# Altium PCB PowerHAT_1B2.PcbDoc
Units mm, origin at the board's own origin, x right, y up, seen from the top; angles counter-clockwise.
Board outline 65 x 56 mm, 2 copper layers (TopLayer, BottomLayer); 36 components, 41 nets, 140 pads, 4 vias.
Unrouted connection lines stored in the file: 1.
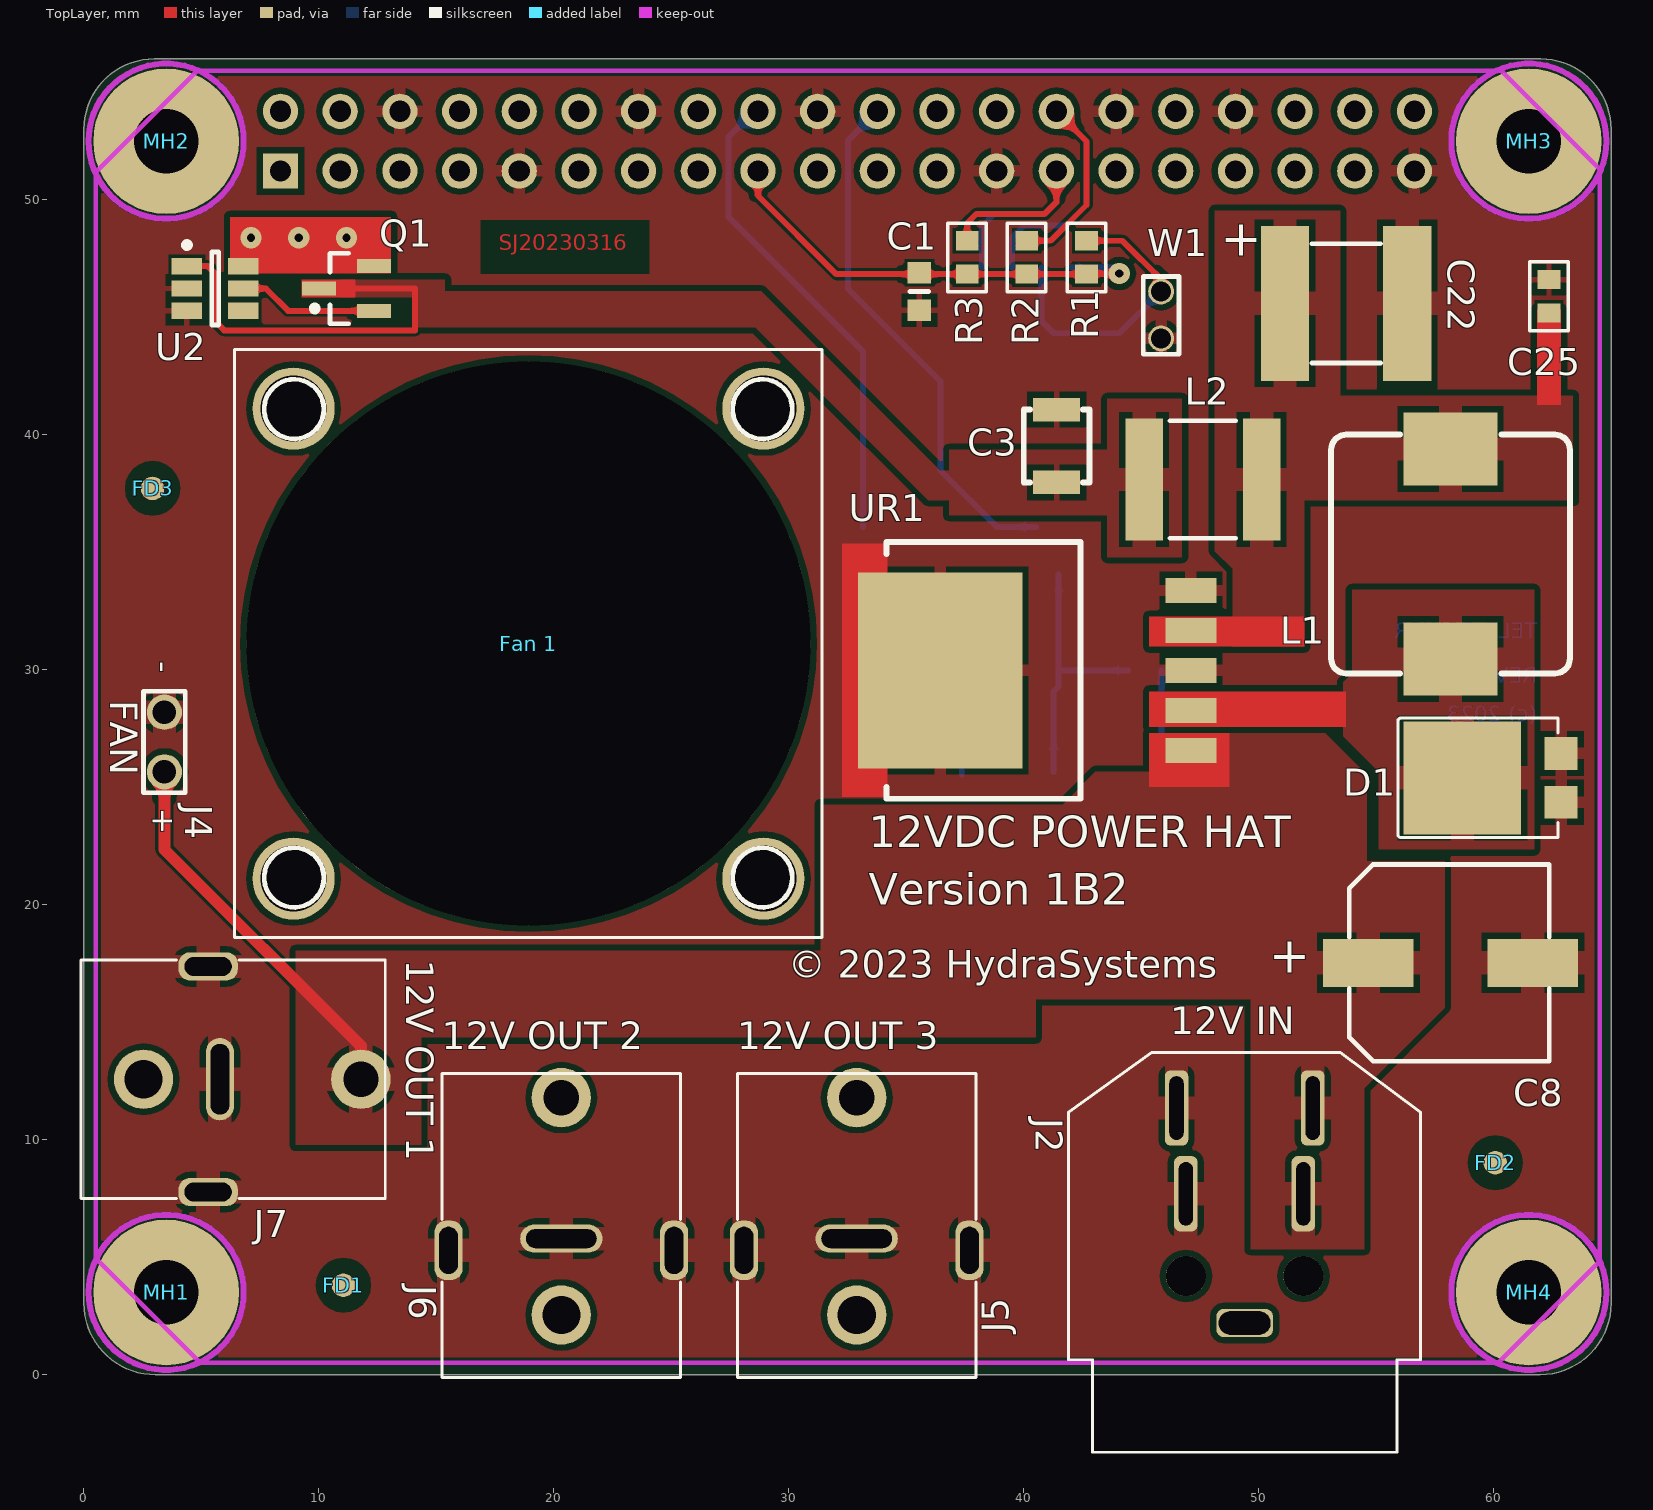
[diagram p0: TopLayer view]
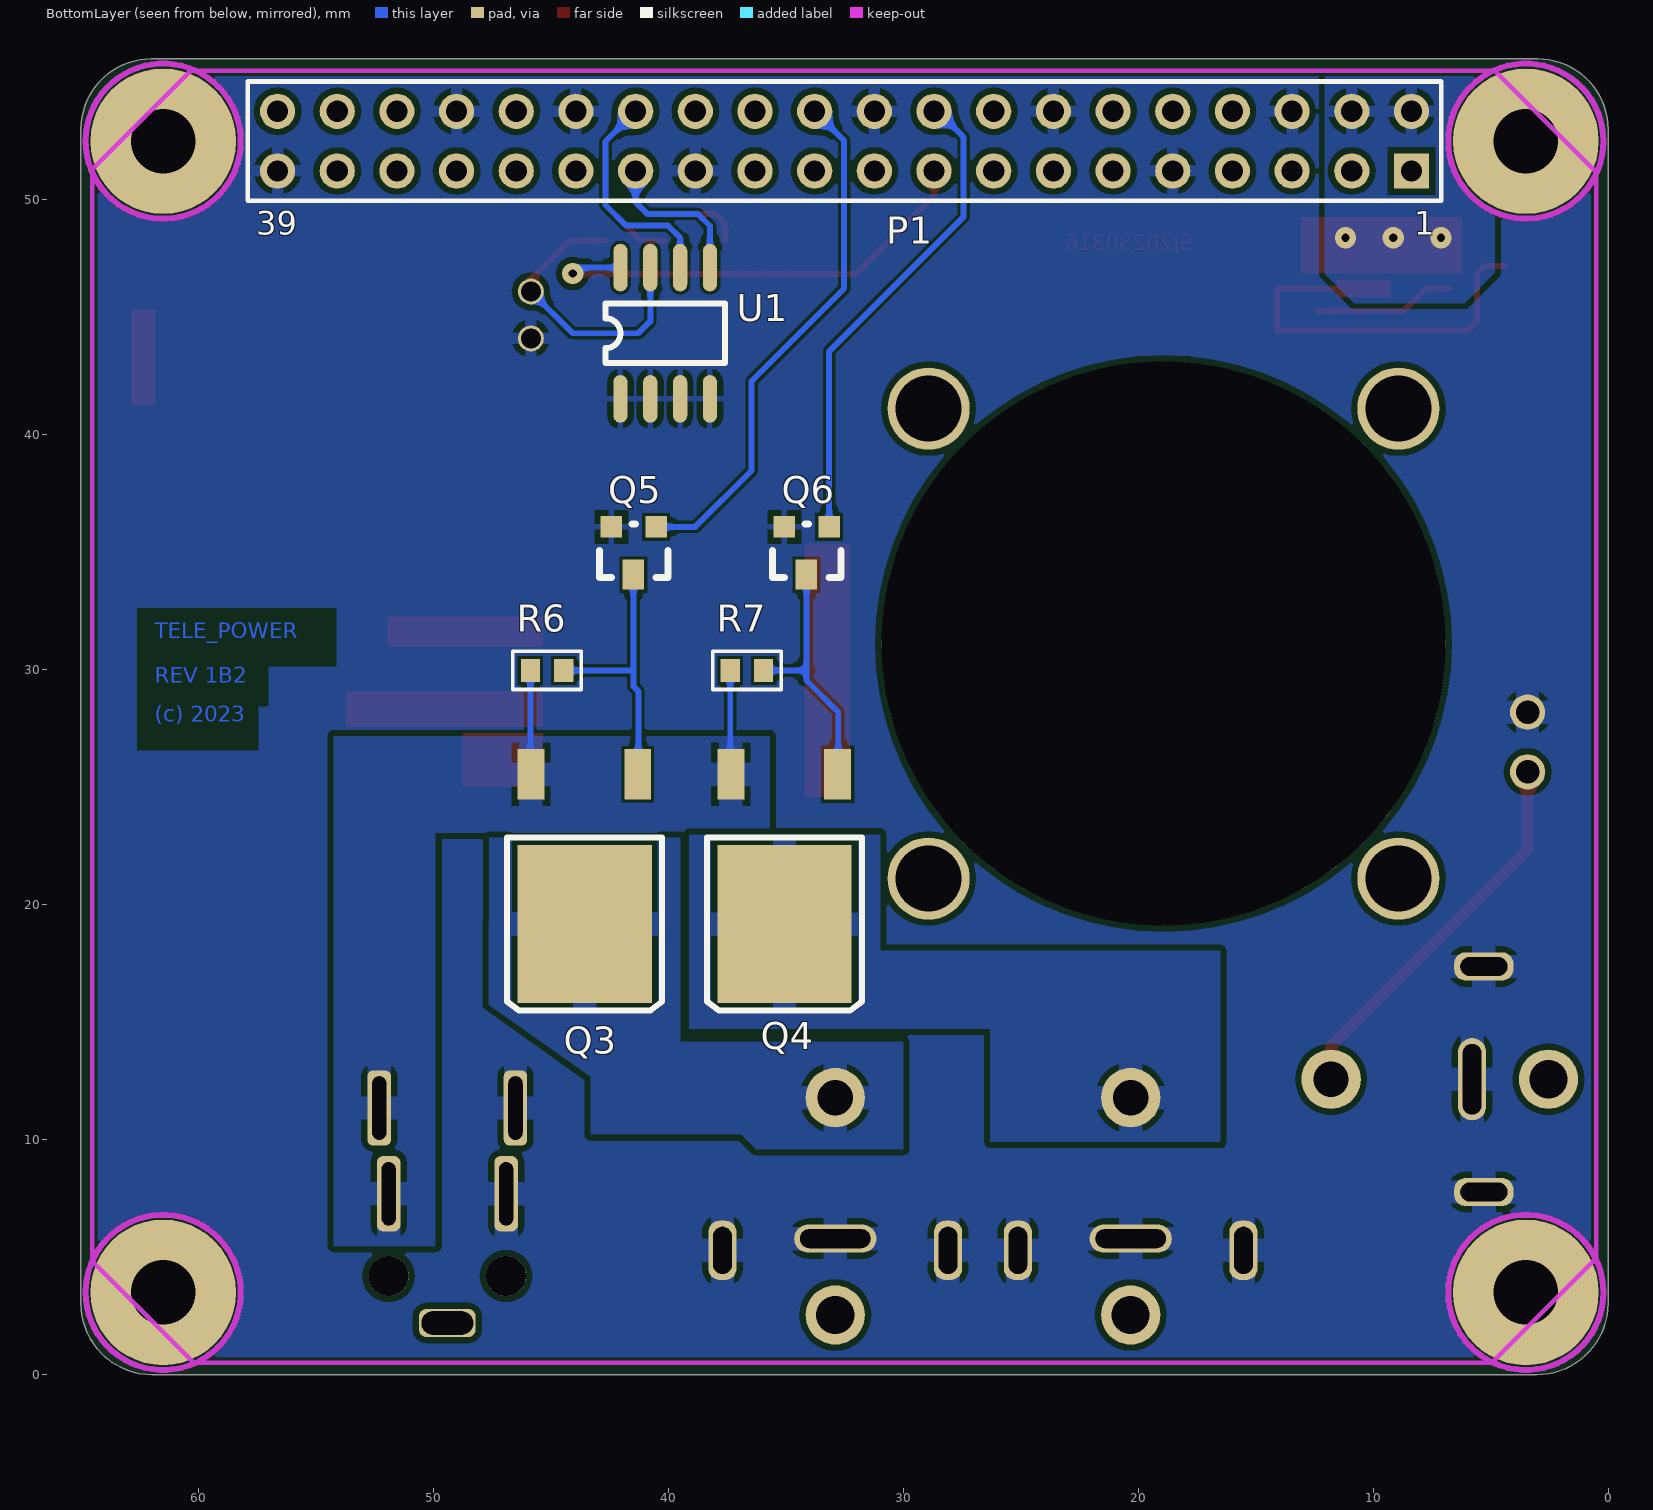
[diagram p1: BottomLayer view, seen from below]

## Layer stack, top to bottom
TopSolder: solder mask 0.0102, Solder Resist, Dk 3.5
TopLayer: signal copper 0.0356
Dielectric1: core 0.32, FR-4, Dk 4.8
BottomLayer: signal copper 0.0356
BottomSolder: solder mask 0.0102, Solder Resist, Dk 3.5

## Board outline
0,3.048 0,18.5 0,53 cw(c3,53) 3,56 62,56 cw(c62,53) 65,53 65,3.048 cw(c61.964,3.036) 61.976,0 3.051,0 3.048,-0.003 cw(c3.048,3.048)

## Design rules (kind name [scope] priority, off if disabled: settings)
Clearance FiducialClearance [HasFootprint('Fiducial') or InComponent('MH5')] p1: gap=0.66 ignorepadtopadclearanceinfootprint=TRUE except(0: Arc-Hole Track-Hole SMDPad-Hole THPad-Hole Via-Hole Fill-Hole Poly-Hole Region-Hole Text-Hole)
Clearance Mount [InComponent('MH1') or InComponent('MH2') or InComponent('MH3') or InComponent('MH4')] p2: gap=0 ignorepadtopadclearanceinfootprint=TRUE
Clearance PolyClearance [InPolygon vs IsPad or IsTrack or InPolygon] p3: gap=0.127 ignorepadtopadclearanceinfootprint=FALSE except(0: Arc-Hole Track-Hole SMDPad-Hole THPad-Hole Via-Hole Fill-Hole Poly-Hole Region-Hole Text-Hole; 0.254: THPad-THPad THPad-Via THPad-Fill THPad-Poly THPad-Region THPad-Text Via-Via Via-Fill Via-Poly Via-Region Via-Text Fill-Fill Fill-Poly Fill-Region Poly-Poly Poly-Region Region-Region Text-Text)
Clearance [All] p4: gap=0.127 ignorepadtopadclearanceinfootprint=FALSE except(0: Arc-Hole Track-Hole THPad-Hole Via-Hole Fill-Hole Poly-Hole Region-Hole Text-Hole; 0.254: THPad-THPad THPad-Via THPad-Fill THPad-Poly THPad-Region THPad-Text Via-Via Via-Fill Via-Poly Via-Region Via-Text Fill-Fill Fill-Poly Fill-Region Fill-Text Poly-Poly Poly-Region Poly-Text Region-Region Region-Text Text-Text)
ComponentClearance [All And Not (InComponent('StaticWarning') Or InComponent('Attention')) vs All And Not (InComponent('StaticWarning') Or InComponent('Attention'))] p1: gap=0.051 collisioncheckmode=3 verticalgap=0.254 showdistances=FALSE
FabricationTestPointUsage TestPointUsage [All] p1: valid=0 allowmultiple=FALSE
FabricationTestpoint Testpoint [All] p1: side=3 testpointundercomponent=TRUE minsize=1.016 maxsize=2.54 preferedsize=1.524 minholesize=0.508 maxholesize=1.016 preferedholesize=0.813 testpointgrid=0.025 allowsidetop=TRUE allowsidebottom=TRUE usegrid=TRUE gridtolerance=0
HoleSize FanHole [InComponent('Fan 1')] p1: absolutevalues=TRUE maxlimit=25 minlimit=0.025 maxpercent=80.000 minpercent=20.000
HoleSize [All] p2: absolutevalues=TRUE maxlimit=4 minlimit=0.025 maxpercent=80.000 minpercent=20.000
PolygonConnect PolyConnectComp [(InComponent('C8') OR InComponent('C22') OR InComponent('J1') OR InComponent('J3') OR InComponent('J4') OR InComponent('L1') OR InComponent('L2') OR InComponent('Q3') OR InComponent('Q4'))] p1: thpad.connectstyle=Relief thpad.reliefconductorwidth=1.016 thpad.reliefentries=4 thpad.polygonreliefangle="90 Angle" thpad.airgapwidth=0.254 smdpad.connectstyle=Relief smdpad.reliefconductorwidth=1.016 smdpad.reliefentries=4 smdpad.polygonreliefangle="90 Angle" smdpad.airgapwidth=0.254 via.connectstyle=Relief via.reliefconductorwidth=0.254 via.reliefentries=4 via.polygonreliefangle="90 Angle" via.airgapwidth=0.254
PolygonConnect PolyConnectNetC22 [InNet('NetC22_1') vs (InComponent('L1') OR InComponent('L2'))] p2: thpad.connectstyle=Relief thpad.reliefconductorwidth=0.508 thpad.reliefentries=4 thpad.polygonreliefangle="90 Angle" thpad.airgapwidth=0.254 smdpad.connectstyle=Relief smdpad.reliefconductorwidth=1.016 smdpad.reliefentries=4 smdpad.polygonreliefangle="90 Angle" smdpad.airgapwidth=0.254 via.connectstyle=Direct via.reliefconductorwidth=0.254 via.reliefentries=4 via.polygonreliefangle="90 Angle" via.airgapwidth=0.254
PolygonConnect PolyConnectNetV12 [(InNet('12V') or InNet('NetJ5_1') or InNet('NetJ6_1') or InNet('0V')) vs (InComponent('J2') OR InComponent('J5') OR InComponent('J6') OR InComponent('J7'))] p3: thpad.connectstyle=Relief thpad.reliefconductorwidth=1.016 thpad.reliefentries=4 thpad.polygonreliefangle="90 Angle" thpad.airgapwidth=0.254 smdpad.connectstyle=Relief smdpad.reliefconductorwidth=1.016 smdpad.reliefentries=4 smdpad.polygonreliefangle="90 Angle" smdpad.airgapwidth=0.254 via.connectstyle=Direct via.reliefconductorwidth=0.254 via.reliefentries=4 via.polygonreliefangle="90 Angle" via.airgapwidth=0.254
PolygonConnect PolyConnectNetD1 [InNet('NetD1_1') vs (InComponent('L1') OR InComponent('UR1') OR InComponent('D1'))] p4: thpad.connectstyle=Relief thpad.reliefconductorwidth=0.508 thpad.reliefentries=4 thpad.polygonreliefangle="90 Angle" thpad.airgapwidth=0.254 smdpad.connectstyle=Relief smdpad.reliefconductorwidth=1.016 smdpad.reliefentries=4 smdpad.polygonreliefangle="90 Angle" smdpad.airgapwidth=0.254 via.connectstyle=Direct via.reliefconductorwidth=0.254 via.reliefentries=4 via.polygonreliefangle="90 Angle" via.airgapwidth=0.254
PolygonConnect PolyConnectNet0V [InNet('0V') vs (InComponent('UR1') OR InComponent('D1'))] p5: thpad.connectstyle=Relief thpad.reliefconductorwidth=0.508 thpad.reliefentries=4 thpad.polygonreliefangle="90 Angle" thpad.airgapwidth=0.254 smdpad.connectstyle=Relief smdpad.reliefconductorwidth=0.508 smdpad.reliefentries=4 smdpad.polygonreliefangle="90 Angle" smdpad.airgapwidth=0.254 via.connectstyle=Direct via.reliefconductorwidth=0.254 via.reliefentries=4 via.polygonreliefangle="90 Angle" via.airgapwidth=0.254
PolygonConnect PolyConnectNet24V [InNet('+12V') vs InComponent('UR1')] p6: thpad.connectstyle=Relief thpad.reliefconductorwidth=0.508 thpad.reliefentries=4 thpad.polygonreliefangle="90 Angle" thpad.airgapwidth=0.254 smdpad.connectstyle=Direct smdpad.reliefconductorwidth=0.254 smdpad.reliefentries=4 smdpad.polygonreliefangle="90 Angle" smdpad.airgapwidth=0.254 via.connectstyle=Direct via.reliefconductorwidth=0.254 via.reliefentries=4 via.polygonreliefangle="90 Angle" via.airgapwidth=0.254
PolygonConnect [All] p7: thpad.connectstyle=Relief thpad.reliefconductorwidth=0.508 thpad.reliefentries=4 thpad.polygonreliefangle="90 Angle" thpad.airgapwidth=0.254 smdpad.connectstyle=Relief smdpad.reliefconductorwidth=0.254 smdpad.reliefentries=4 smdpad.polygonreliefangle="90 Angle" smdpad.airgapwidth=0.254 via.connectstyle=Direct via.reliefconductorwidth=0.254 via.reliefentries=4 via.polygonreliefangle="90 Angle" via.airgapwidth=0.254
RoutingVias [All] p1: holewidth=0.711 width=1.27 viastyle="Through Hole" minholewidth=0.2 minwidth=0.25 maxholewidth=1 maxwidth=2
ShortCircuit NoNet [Net = 'No Net' vs Net = 'No Net'] p1: allowed=TRUE
ShortCircuit [All] p2: allowed=FALSE
SilkToSolderMaskClearance SilkscreenOverComponentPads [IsPad] p1: minsilkscreentomaskgap=0.254 clearancetoexposedcopper=TRUE
SolderMaskExpansion [All] p1: expansion=0.102
Width "No Net" [Net = 'No Net'] p1: maxlimit=2.54 minlimit=0.254 preferedwidth=0.254
Width Power [InNetClass('PowerClass')] p2: maxlimit=2.032 minlimit=0.254 preferedwidth=2.032
Width [All] p3: maxlimit=0.508 minlimit=0.127 preferedwidth=0.254
24 further rules are at their usual default settings.

## Classes and differential pairs
net class PowerClass: 12V +5V NetD1_1 NetJ5_1 NetJ6_1

## Components (designator, comment, footprint, x,y, rotation, side; value= is the part's Value field where it differs from the comment)
C1 "100nF" 0603_C 35.56,46.101 r90 top
C3 "10uF" 1206 41.402,37.973 r90 top
C8 "100uF" "CASE H" 58.171,17.526 r180 top
C22 "330uF" 2812 53.721,45.593 r0 top
C25 "100nF" SM/R_0603 62.357,46.609 r270 top
D1 "SS10PH10" TO-277A 58.674,25.4 r0 top
"Fan 1" "Comment" DC5VFAN 18.923,31.115 r90 top locked
FD1 "Fiducial" Fiducial 11.049,3.81 r0 top
FD2 "Fiducial" Fiducial 60.071,9.017 r90 top
FD3 "Fiducial" Fiducial 2.921,37.719 r90 top
J2 "KPJX-4S-S" KPJX-4S-S 49.403,-3.302 r180 top locked
J4 "FAN Power" CON2 3.429,28.194 r270 top
J5 "Switched Power 2" DCJ250-20 32.893,2.54 r0 top locked
J6 "Switched Power 1" DCJ250-20 20.32,2.54 r0 top locked
J7 "Unswitched Power" DCJ250-20 2.54,12.573 r270 top locked
L1 "68uH" IHLP4040DZER 58.166,34.925 r180 top
L2 "FB-270R" 2220 47.625,38.1 r180 top
MH1 "MOUNTING HOLE 2MM" MOUNTING_HOLE_2MM 3.5,3.5 r0 top
MH2 "MOUNTING HOLE 2MM" MOUNTING_HOLE_2MM 3.5,52.5 r0 top
MH3 "MOUNTING HOLE 2MM" MOUNTING_HOLE_2MM 61.5,52.5 r0 top
MH4 "MOUNTING HOLE 2MM" MOUNTING_HOLE_2MM 61.5,3.5 r0 top
P1 "Header 20X2H" "HEADER40 INVERT" 32.5,52.5 r0 bottom
Q1 "DMG2305UX" DMG2305 11.176,46.228 r180 top
Q3 "IRFR9024" TO-252AA 41.275,25.527 r0 bottom
Q4 "IRFR9024" TO-252AA 32.766,25.527 r0 bottom
Q5 "TSM2306CX" FDV301N 40.513,36.068 r0 bottom
Q6 "TSM2306CX" FDV301N 33.147,36.068 r0 bottom
R1 "1K0" SM/R_0603 42.672,48.26 r270 top
R2 "3K9" SM/R_0603 40.132,48.26 r270 top
R3 "3K9" SM/R_0603 37.592,48.26 r270 top
R6 "47K" SM/R_0603 44.45,29.972 r0 bottom
R7 "47K" SM/R_0603 35.941,29.972 r0 bottom
U1 "CAT24LC32WI-GT3" SO-8 42.037,41.529 r90 bottom
U2 "LTC4412" SOT23-6_M 5.588,46.228 r0 top
UR1 "LM2596-5.0" LM2596 36.449,29.972 r90 top
W1 "Jumper" Link2 45.847,46.101 r270 top

## Footprints (in the part's own frame and the unit in brackets; to place one, negate y for a bottom-side part, rotate by r counter-clockwise, add the part's x,y. Pads: shape width x height; smd on the part's side, far side on the other; paste and mask are expansions set on the pad)
0603_C [mm]
  rect 0.9x1 smd: 1(-0.8,0) 2(0.8,0)
  silkscreen extent 0,-0.4 0,0.4, body extent -0.8,-0.4 0.8,0.4, height 0.8
1206 [mm] "Multicomp HP06"
  rect 1x2 smd: 1(0,0) 2(3.1,0)
  silkscreen extent 0,-1.4 3.1,1.4, body extent 0,-1.1 3.1,1.1, height 0.45
2220 [mm] "Chip Capacitor, Body 5.7x5.0mm, IPC High Density"
  rect 1.6x5.2 smd: 1(-2.5,0) 2(2.5,0)
  silkscreen extent -1.4,-2.5 1.4,2.5, body extent -2.95,-2.63 2.95,2.63, height 1.4
2812 [mm] "Tantalum Capacitor, Body 7.5x6.3mm, IPC High Density"
  rect 2.05x6.6 smd: 1(-2.6,0) 2(2.6,0)
  silkscreen extent -1.46,-2.54 1.46,2.54, body extent -5.46,-2.54 3.68,2.54, height 2
"CASE H" [mm]
  rect 3.85x2.05 smd: 1(3.5,0) 2(-3.5,0)
  silkscreen extent -4.19,-4.19 4.32,4.19, body extent -4.19,-4.19 4.32,4.19, height 10.71
CON2 [mm] "2 pin wire to board"
  round 1.5 hole 1: 1(0,0) 2(2.54,0)
  silkscreen extent -0.89,-0.89 3.43,0.89
DC5VFAN [mm] "25x25x7 DC5V Fan"
  round 3.5 hole 2.8: 1(-10,-10) 1(-10,10) 1(10,-10) 1(10,10)
  round 24 hole 24 unplated: 2(0,0)
  silkscreen extent -12.5,-12.5 12.52,12.52, body extent -12.5,-12.5 12.52,12.52, height 7.6
DCJ250-20 [mm] "Power Jack"
  round 2.524 hole 1.62: 0(0,0)
  round 2.524 hole 1.5: 1(0,9.25)
  rrect80% 1.2x2.524 hole 0.8 slot 2 at 90 deg: 2(-4.8,2.75) 2(4.8,2.75)
  oval 3.5x1.2 hole 0.8 slot 3 at 0 deg: 2(0,3.25)
  silkscreen extent -5.08,-2.67 5.08,10.29, body extent -5.08,-2.92 5.08,10.29, height 10
DMG2305 [mm] "SOT23, 3-Leads, Body 2.9x1.3mm, Pitch 0.95mm, Lead Span 2.3mm - Reverse Pinning, IPC Low Density"
  rect 1.45x0.6 smd: 1(1.175,0) 2(-1.175,0.95) 3(-1.175,-0.95)
  silkscreen extent -0.1,-1.5 1.47,1.5, body extent -0.7,-1.5 0.7,1.5, height 1.1
FDV301N [mil]
  rect 36x36 smd: 1(0.24,-0.5) 3(75.24,-0.5)
  rect 36x50 smd: 2(38.24,79.5)
  silkscreen extent -20,-5 95,85, body extent -14,2 89,78, height 39
Fiducial [mm] "Registration Fiducial"
  round 1 smd paste-1 mask+0.5: 0(0,0)
"HEADER40 INVERT" [mm] "40 Pin Header"
  rect 1.5x1.5 hole 0.9: 1(-24.13,1.27)
  round 1.5 hole 0.9: 2(-24.13,-1.27) 3(-21.59,1.27) 4(-21.59,-1.27) 5(-19.05,1.27) 6(-19.05,-1.27) 7(-16.51,1.27) 8(-16.51,-1.27) 9(-13.97,1.27) 10(-13.97,-1.27) 11(-11.43,1.27) 12(-11.43,-1.27) 13(-8.89,1.27) 14(-8.89,-1.27) 15(-6.35,1.27) 16(-6.35,-1.27) 17(-3.81,1.27) 18(-3.81,-1.27) 19(-1.27,1.27) 20(-1.27,-1.27) 21(1.27,1.27) 22(1.27,-1.27) 23(3.81,1.27) 24(3.81,-1.27) 25(6.35,1.27) 26(6.35,-1.27) 27(8.89,1.27) 28(8.89,-1.27) 29(11.43,1.27) 30(11.43,-1.27) 31(13.97,1.27) 32(13.97,-1.27) 33(16.51,1.27) 34(16.51,-1.27) 35(19.05,1.27) 36(19.05,-1.27) 37(21.59,1.27) 38(21.59,-1.27) 39(24.13,1.27) 40(24.13,-1.27)
  silkscreen extent -25.4,-2.54 25.4,2.54, body extent -25.4,-2.54 25.4,2.54, height 10
IHLP4040DZER [mm] "Power Choke"
  rect 4x3.12 smd: 1(0,4.47) 2(0,-4.47)
  silkscreen extent -5.08,-5.08 5.08,5.08, body extent -5.08,-5.21 5.08,5.21, height 4
KPJX-4S-S [mm] "Kycom 4 pin power connector"
  round 1.7 hole 1.7 unplated: 0(-2.5,-7.5) 0(2.5,-7.5)
  rrect50% 2.4x1.2 hole 1 slot 2.2 at 0 deg: 0(0,-5.5)
  rrect50% 1x3.2 hole 0.6 slot 2.7 at 90 deg: 1(2.9,-14.65) 2(-2.9,-14.65) 3(2.5,-11) 4(-2.5,-11)
  silkscreen extent -7.49,-17.02 7.49,0, body extent -7.49,-17.02 7.49,0.05, height 15
Link2 [mm]
  round 1.1 hole 0.86: 1(0,0) 2(2,0)
  silkscreen extent -0.64,-0.76 2.67,0.76, body extent -0.64,-0.76 2.67,0.76, height 6.5
LM2596 [mil] "TI LM2596 TO-263"
  rect 42x85 smd: 1(-134,-420) 2(-67,-420) 3(0,-420) 4(67,-420) 5(134,-420)
  rect 328x275 smd: 3(0,0)
  TopLayer region: -212,164 -212,89 212,89 212,164
  silkscreen extent -215,-235 215,90, body extent -200,-425 200,138, height 180
MOUNTING_HOLE_2MM [mm] "Non-plated mounting hole for 3mm screw"
  round 6.2 hole 2.75 mask+0.2: ""(0,0)
  KeepOutLayer circle w0.254: c0,0 r3.302
SM/R_0603 [mm]
  rect 0.813x0.965 smd: 1(0,0) 2(1.422,0)
  silkscreen extent -0.75,-0.83 2.17,0.81, body extent -0.3,-0.58 1.73,0.58, height 0.5
SO-8 [mil]
  oval 80x24 smd: 1(0,0) 2(0,-50) 3(0,-100) 4(0,-150) 5(220,-150) 6(220,-100) 7(220,-50) 8(220,0)
  silkscreen extent 60,-175 160,25, body extent 60,-175 160,25, height 63
SOT23-6_M [mm] "SOT23, 6-Leads, Body 2.9x1.6mm, Pitch 0.95mm, Lead Span 2.7mm, IPC Low Density"
  rect 1.3x0.7 smd: 1(-1.2,0.95) 2(-1.2,0) 3(-1.2,-0.95) 4(1.2,-0.95) 5(1.2,0) 6(1.2,0.95)
  silkscreen extent -1.32,-1.55 0.15,1.97, body extent -0.9,-1.55 0.9,1.55, height 1.45
TO-252AA [mil]
  rect 225x265 smd: 1(90,250)
  rect 45x85 smd: 2(1,-1) 3(180,-1)
  silkscreen extent -40,105 220,395, body extent -26,0 206,380, height 51
TO-277A [mm] "Diode; 3 Leads"
  rect 5x4.8 smd: 1(0,0)
  rect 1.4x1.4 smd: 2(4.2,-1.04) 3(4.2,1.04)
  silkscreen extent -2.75,-2.54 4.06,2.54, body extent -2.29,-2.29 4.19,2.29, height 1.2

## Part data
C1: library part "CAPACITOR NON-POL", "MLCC 100nF 0402 X7R 16V", Dielectric=X7R, Voltage=16V, Capacitance=100nF, Text Field1=20, Text Field2=10
C3 C22: library part "Cap Pol3", "Polarized Capacitor (Surface Mount)", Voltage=10V
C8: library part "Cap Pol3", "Polarized Capacitor (Surface Mount)", Voltage=50V, Farnell PN=926-5775, Multicomp PN=MCESL50V107M8X10.5
C25: library part Cap, "Capacitor", Voltage=50V, Farnell PN=114-1772
D1: library part SS10PH, "Schottky Rectifier", Manufacturer=Vishay, Farnell PN=181-5648, Manufacturer PN=SS10PH10
FD1 FD2 FD3: "Registration Fiducial", Category=Graphic-PCB, Status=Production
J2: library part "Header 4", "Power 4-Pin", FARNELL=283-9851, Kycom=KPJX-4S-S, LatestRevisionDate=17-Jul-2002, LatestRevisionNote="Re-released for DXP Platform.", Publisher="Altium Limited"
J4: library part Pads, "2 pads", LatestRevisionDate=17-Jul-2002, LatestRevisionNote="Re-released for DXP Platform.", PackageReference=RAD-0.2, Published=24-Mar-1999, Publisher="Altium Limited"
J5 J6 J7: library part "Header 2", "Power Jack", FARNELL=267-3247, GCT=DCJ250-20-B-K1-A, LatestRevisionDate=17-Jul-2002, LatestRevisionNote="Re-released for DXP Platform.", Publisher="Altium Limited"
L1: library part "Ferrite Inductor", "Ferrite Inductor", Manufacturer=Vishay, Part Number 47=IHLP-4040DZER470M11, Part Number 68=IHLP-4040DZER680M8A, Saturation Current=4.1A, Value47=47uH, Farnell Number 47=154-7059, Farnell Number 68=296-5633, Value68=68uH
L2: library part "Ferrite Bead", "Ferrite Bead", Manufacturer=Wurth, Manufacturer PN=74279224271, Farnell Number=206-6850
MH1 MH2 MH3 MH4: library part MOUNTING_HOLE_2MM, "Mounting Hole, M2 Screw, Plated, Square Pad", Category=Mounting-Hole, Status=Production
P1: "Header, 20-Pin, Dual row, Right Angle", LatestRevisionDate=17-Jul-2002, LatestRevisionNote="Re-released for DXP Platform.", Publisher="Altium Limited"
Q1: "P-Channel MOSFET", LatestRevisionDate=17-Jul-2002, LatestRevisionNote="Re-released for DXP Platform.", PackageDescription="TO, Flat Index; 3 In-Line, Axial Leads; Body Dia. 4.6mm; Lead Dia. 0.5 mm (max)", PackageReference=E3, PackageVersion=1995/1996, Published=8-Jun-2000, Publisher="Altium Limited"
Q3 Q4: library part MOSFET-P, "P-Channel MOSFET", LatestRevisionDate=17-Jul-2002, LatestRevisionNote="Re-released for DXP Platform.", PackageDescription="TO, Flat Index; 3 In-Line, Axial Leads; Body Dia. 4.6mm; Lead Dia. 0.5 mm (max)", PackageReference=E3, PackageVersion=1995/1996, Published=8-Jun-2000, Publisher="Altium Limited"
Q5 Q6: library part FDV301N, "MOSFET, N Channel, 30 V, 3.5 A, 0.046 ohm, SOT-23", Full Part Number="TSM2306CX RFG", FARNELL=186-4577, Name=TSM2306CX
R1 R2 R3 R6 R7: library part Res2, "Resistor", LatestRevisionDate=17-Jul-2002, LatestRevisionNote="Re-released for DXP Platform.", PackageDescription="Axial Device, Thru-Hole; 2 Leads; 0.4 in Pin Spacing", PackageReference=AXIAL-0.4, Published=8-Jun-2000, Publisher="Altium Limited"
U1: library part 24LC00, Text Field1=60, Text Field2=50
UR1: library part LM2596-ADJ, "1000mA DC/DC Convertor, 3-pin SIP", PartNumber=TO-263, FARNELL=300-8164, PinCount=4, TI PN=LM2596-5.0
W1: "Jumper Wire", LatestRevisionDate=17-Jul-2002, LatestRevisionNote="Re-released for DXP Platform.", PackageReference=RAD-0.2, Published=24-Mar-1999, Publisher="Altium Limited"
U2: Text Field1=60, Text Field2=50

## Via types
v1: diameter 0.9, hole 0.35, TopLayer to BottomLayer, tented both sides, 4 vias

## Nets (pads, with @x,y where several pads share a name; then routed paths per layer and width w, separated by ;. In a path a pad name is that pad's centre, name@x,y a point inside that pad or via, vN(x,y) a via of type N, cw(c..) or ccw(c..) an arc to the next point about the centre after c; other vN are vias at no path point)
0V: C1.1 C3.2 C8.2 C22.2 C25.1 D1.2 D1.3 J2.1 J2.3 J4.1 J5.2 J6.2 J7.2 P1.6 P1.9 P1.14 P1.20 P1.25 P1.30 P1.34 P1.39 Q5.3 Q6.3 U1.1 U1.2 U1.3 U1.4 U2.2 U2.3 UR1.3 UR1.5 W1.2
3V3: C1.2 P1.1 P1.17 R1.2 R2.2 R3.2 U1.8 | length 20
  TopLayer w0.254: P1.17 28.69,50.177 32.029,46.838 R3.2 R2.2 R1.2 42.697,46.863 v1(44.069,46.863)
  BottomLayer w0.254: U1.8 43.815,47.117 v1(44.069,46.863)
12V: C8.1 J2.2 J2.4 J4.2 J7.1 Q3.3 Q4.3 R6.2 R7.2 UR1.1 | length 25.3
  TopLayer w0.5: J4.2 3.429,22.352 11.79,13.991 J7.1
  BottomLayer w0.254: Q4.3@37.363,25.552 R7.2 ; Q3.3@45.872,25.654 R6.2
+5V: C3.1 L2.2 Q1.1 U2.1 | length 17.9
  TopLayer w0.254: U2.1 5.273,47.178 5.588,46.863 5.588,44.831 5.969,44.45 14.097,44.45 14.097,46.228 Q1.1
CE0: P1.24
CE1: P1.26
GCLK0: P1.7
GCLK1: P1.29
GCLK2: P1.31
GPIO0: P1.11
GPIO2: P1.13
GPIO3: P1.15
GPIO4: P1.16
GPIO5: P1.18 Q6.1 | length 20.7
  BottomLayer w0.254: P1.18 28.532,53.77 27.432,52.67 27.432,49.276 33.153,43.555 Q6.1
GPIO6: P1.22 Q5.1 | length 22.5
  BottomLayer w0.254: P1.22 32.512,52.512 32.512,46.228 36.449,42.291 36.449,38.481 38.849,36.081 Q5.1
GPIO25: P1.37
GPIO26: P1.32
GPIO27: P1.36
ID_SC: P1.28 R2.1 U1.6 | length 17.2
  TopLayer w0.254: R2.1 41.148,48.26 42.672,49.784 42.672,52.488 P1.28
  BottomLayer w0.254: U1.6 39.497,48.387 40.011,48.901 41.789,48.901 42.672,49.784 42.672,52.488 P1.28
ID_SD: P1.27 R3.1 U1.5 | length 12.9
  TopLayer w0.254: R3.1 37.592,49.003 37.992,49.403 40.894,49.403 41.39,49.899 P1.27
  BottomLayer w0.254: U1.5 38.227,48.885 38.745,49.403 40.894,49.403 41.39,49.899 P1.27
NetC22_1: C22.1 C25.2 L1.2 L2.1 UR1.4
NetD1_1: D1.1 L1.1 UR1.2
NetJ5_1: J5.1 Q3.1
NetJ6_1: J6.1 Q4.1
NetQ1_2: Q1.2 U2.5 | length 6
  TopLayer w0.254: U2.5 7.747,46.228 8.697,45.278 Q1.2
NetQ3_2: Q3.2 Q5.2 R6.1 | length 11.5
  BottomLayer w0.254: Q3.2@41.275,25.654 41.275,29.083 41.484,29.292 41.484,30.017 ; Q5.2 41.484,30.017 ; R6.1 41.529,29.972 41.484,30.017
NetQ4_2: Q4.2 Q6.2 R7.1 | length 10.8
  BottomLayer w0.254: Q4.2@32.766,25.654 32.766,28.194 34.118,29.546 34.118,29.972 ; Q6.2 34.118,29.972 ; R7.1 34.118,29.972
NetR1_1: R1.1 U1.7 W1.1 | length 12.7
  TopLayer w0.254: R1.1 44.196,48.26 45.847,46.609 W1.1
  BottomLayer w0.254: U1.7 40.767,44.831 41.275,44.323 44.069,44.323 W1.1
PWM0: P1.12
PWM1: P1.33
SCL1: P1.5
SDA1: P1.3
SPI0_MISO: P1.21
SPI0_MOSI: P1.19
SPI0_SCLK: P1.23
SPI1_MISO: P1.35
SPI1_MOSI: P1.38
SPI1_SCLK: P1.40
UART_RX: P1.10
UART_TX: P1.8
VCC: P1.2 P1.4 Q1.3 U2.6
  other v1: 7.112,48.387 9.144,48.387 11.176,48.387
pads on no net: "Fan 1.1" "Fan 1.2" FD1.0 FD2.0 FD3.0 J2.0 J5.0 J6.0 J7.0 MH1. MH2. MH3. MH4. U2.4

## Polygon pours and split planes (outlines as drawn)
VCC on BottomLayer "NetP1-1" (solid, pour order 1044): 4.826,55.499 12.065,55.499 12.065,46.863 10.795,45.593 6.111,45.593 4.815,46.889 4.815,55.488
0V on BottomLayer "BotGND" (solid, pour order 1050): 0.381,55.499 0.508,37.084 0.508,19.05 0.381,0.508 42.799,0.508 47.244,0.508 64.516,0.508 64.516,55.499
NetJ6_1 on BottomLayer "NetJ6-1" (solid, pour order 1037): 39.116,22.987 30.988,22.987 30.988,18.034 16.51,18.034 16.51,9.906 23.241,9.906 26.289,9.906 26.289,14.732 39.116,14.732
NetJ5_1 on BottomLayer "NetJ4-1" (solid, pour order 1038): 47.615,22.86 39.497,22.86 39.497,14.16 30.009,14.16 30.009,9.588 36.259,9.588 36.893,10.224 43.307,10.223 43.307,12.671 47.639,15.753
12V on BottomLayer "Bot+12V" (solid, pour order 1045): 49.911,5.461 54.229,5.461 54.229,27.178 35.687,27.178 35.687,23.063 49.911,23.063
+5V on TopLayer "NetQ1-1" (solid, pour order 1043): 10.001,46.609 15.367,46.609 15.367,46.101 28.829,46.101 36.449,38.481 37.719,38.481 37.719,37.211 35.941,37.211 28.575,44.577 13.97,44.577 13.97,45.847 10.001,45.847
+5V on TopLayer "NetC3-5V" (solid, pour order 1041): 46.736,41.529 43.561,41.529 43.561,39.37 36.83,39.37 36.83,36.576 43.561,36.576 43.561,34.798 46.736,34.798
NetC22_1 on TopLayer "NetC22-1" (solid, pour order 1040): 48.895,30.988 48.895,34.29 48.133,35.052 48.133,49.53 53.467,49.53 53.467,41.656 63.373,41.656 63.373,37.211 51.943,37.211 51.943,30.988
NetD1_1 on TopLayer "NetD1-1" (solid, pour order 1039): 53.594,29.464 53.975,29.845 53.975,33.401 61.722,33.401 61.722,22.352 55.118,22.352 55.118,25.654 53.594,27.178
12V on TopLayer "Top+12V" (solid, pour order 1046): 49.657,5.334 49.657,15.971 40.513,15.971 40.513,14.351 14.351,14.351 14.351,9.779 9.017,9.779 9.017,18.034 31.369,18.034 31.369,24.257 34.544,24.257 41.656,24.257 43.053,25.654 45.593,25.654 45.593,27.305 52.832,27.305 54.61,25.527 54.61,21.844 57.912,21.844 57.912,15.621 54.483,12.192 54.483,5.334
0V on TopLayer "TopGND" (solid, pour order 1048): 0.508,55.499 0.508,0.508 43.18,0.508 47.244,0.508 64.516,0.508 64.516,55.499

## Keep-outs
KeepOutLayer:
  lines w0.2: 6.8,55.499 4.826,55.499 0.508,51.181 0.508,37.084 0.508,19.05 0.508,7.112 0.508,4.953 4.953,0.508 47.244,0.508 60.198,0.508 64.516,4.826 ; 58.293,55.499 60.325,55.499 64.516,51.308
  lines w0.203: 6.8,55.499 58.293,55.499 ; 64.516,4.826 64.516,51.308

## Other copper
TopLayer:
  rectangle net +5V: 9.271,45.847 11.557,46.609
  rectangle net VCC: 6.223,46.863 13.081,49.276
  rectangle net NetC22_1: 61.849,41.275 62.865,45.339
  rectangle net NetD1_1: 45.339,27.559 53.721,29.083
  rectangle net NetC22_1: 45.339,30.988 51.943,32.258
  rectangle net 12V: 45.339,25.019 48.768,27.305
  text "SJ20230316" at 17.653,47.625 h1.14
BottomLayer:
  text "TELE_POWER" at 61.849,31.115 h1.14
  text "REV 1B2" at 61.849,29.21 h1.14
  text "(c) 2023" at 61.849,27.559 h1.14

## Silkscreen, mask and mechanical layers (free items; w line width, h text height)
TopOverlay:
  text "-" at 2.921,30.353 h1 r270
  text "FAN" at 0.739,28.702 h2 r270
  text "+" at 2.921,24.13 h1 r270
  text "12VDC POWER HAT" at 33.401,21.992 h2.3
  text "Version 1B2" at 33.401,19.558 h2.3
  text "12V OUT 1" at 13.335,17.653 h2 r270
  text "© 2023 HydraSystems" at 29.972,16.51 h2
  text "12V IN" at 46.228,14.097 h2
  text "12V OUT 2" at 15.24,13.462 h2
  text "12V OUT 3" at 27.813,13.462 h2
BoardOutline:
  lines w0.2: 0,3.048 0,18.5 0,37.5 0,53 ; 3.051,0 46.99,0 ; 47,0 61.976,0
  lines w0.203: -0.003,3.048 ccw(c3.048,3.048) 3.048,-0.003 ; 0,53 cw(c3,53) 3,56 61.991,56 ; 61.976,0 ccw(c61.964,3.036) 65,3.048 ; 62,56 cw(c62,53) 65,53 65,3.024

## Dimensions
0,0 to 0,56.007 on Dimensions
0,0 to 65.024,0.762 on Dimensions

## Text inside footprints (layer, text, board x,y; h text height)
C8: TopOverlay "+" at 52.197,18.415 h1.52 r180
C22: TopOverlay "+" at 48.387,47.625 h1.52
P1: BottomOverlay "1" at 8.255,48.514 h1; BottomOverlay "39" at 57.531,48.514 h1